# EAGLE board board (EAGLE 6.5.0)
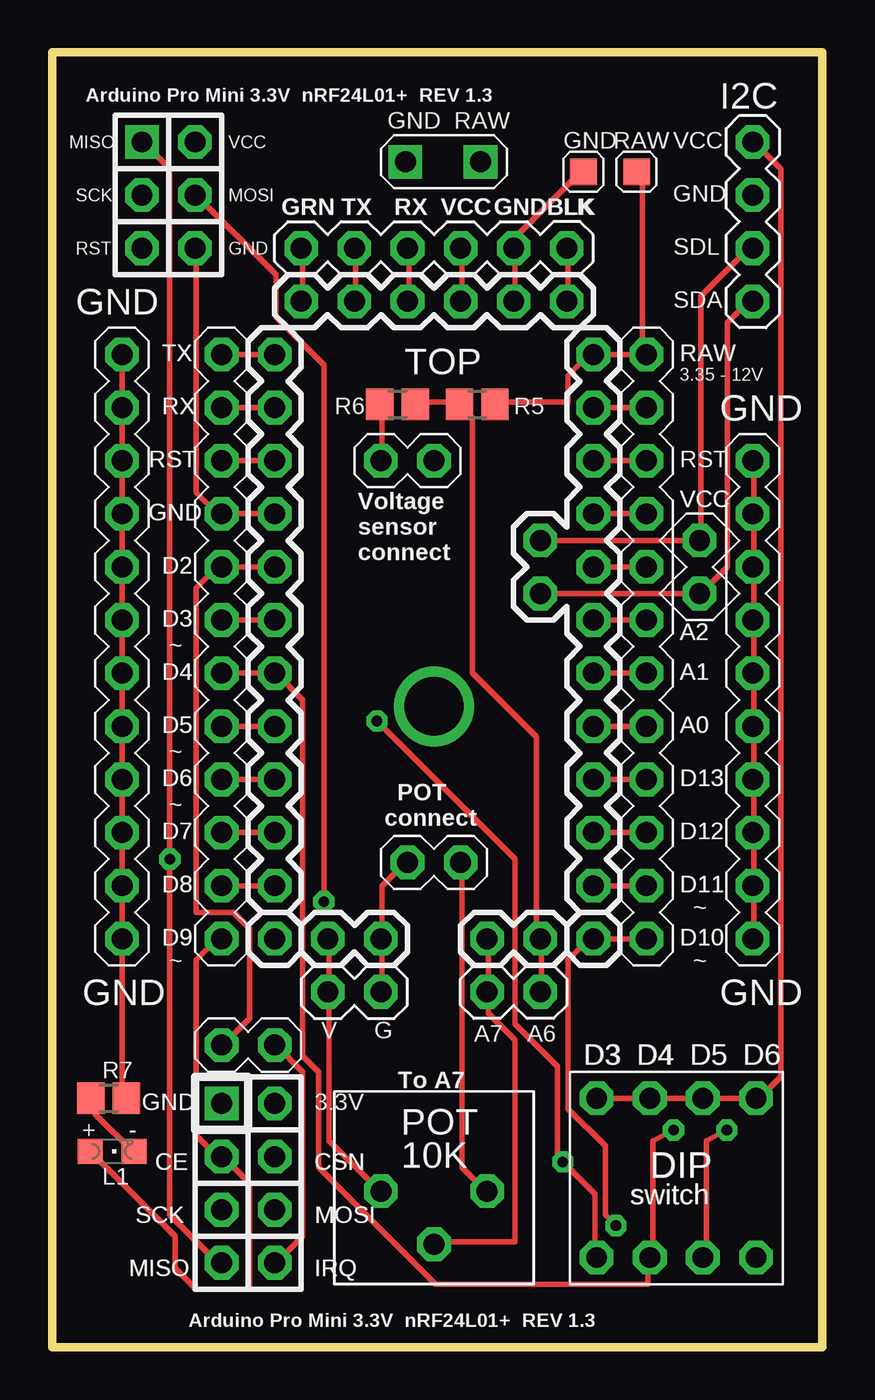
[diagram p0: board, top side]
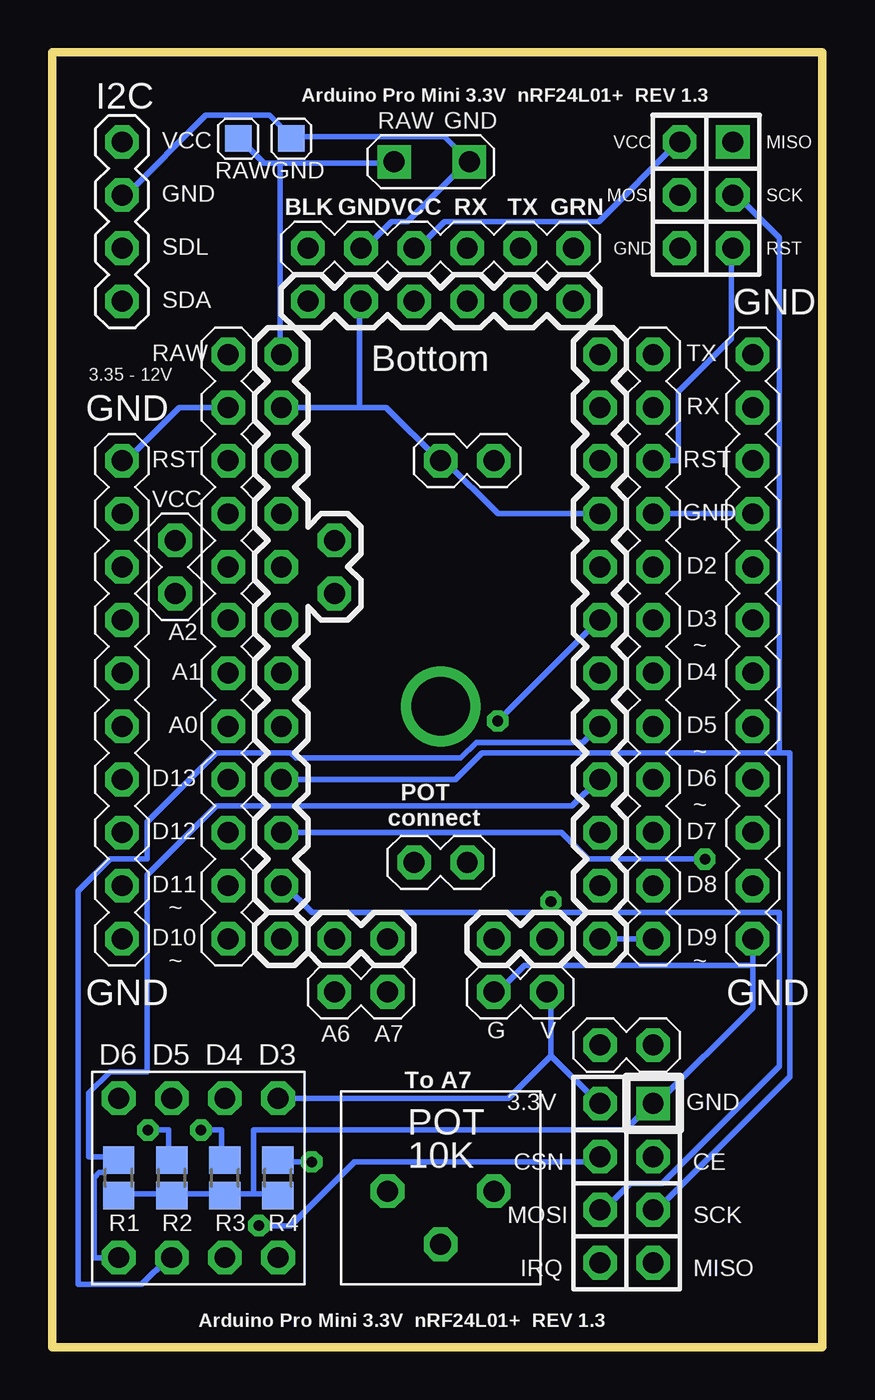
[diagram p1: board, bottom side, seen from below]

Size 36.83 x 61.91 mm. Coordinates in mm from the lower left corner, seen from the top.
Outline: 0,61.91 0,0 36.83,0 36.83,61.91 0,61.91
Copper layers (1*16): Top 0.0356mm / dielectric 1.5011mm / Bottom 0.0356mm
Design rules "SparkFun_oshpark": minimum track width 10mil, minimum drill 20mil, track to track 10mil, track to pad 10mil, pad to pad 10mil, via to via 10mil, smd to smd 10mil, copper to edge 15mil, drill to drill 10mil, minimum pad ring 12mil, minimum via ring 10mil, stop-mask expansion 3mil, vias tented up to drill 0mil, thermal gap 10mil

## Footprints (pad centres in the part's own frame; a part is rotated, then mirrored left to right if it is on the bottom)
ARDUINO_PRO_MINI_3.3V = drill 1 octagon: A0 -4.128,-2.54; A1 -4.128,0; A2 -4.128,2.54; A3 -4.128,5.08; A4 -6.668,3.81; A5 -6.668,6.35; A6 -6.668,-12.7; A7 -9.207,-12.7; BLK -5.397,17.78; D2 -19.367,5.08; D3 -19.367,2.54; D4 -19.367,0; D5 -19.367,-2.54; D6 -19.367,-5.08; D7 -19.367,-7.62; D8 -19.367,-10.16; D9 -19.367,-12.7; D10 -4.128,-12.7; D11 -4.128,-10.16; D12 -4.128,-7.62; D13 -4.128,-5.08; G -14.287,-12.7; GND_0 -4.128,12.7; GND_1 -19.367,7.62; GND_2 -7.938,17.78; GRN -18.098,17.78; RAW -4.128,15.24; RST_0 -4.128,10.16; RST_1 -19.367,10.16; RX -13.018,17.78; RX/D1 -19.367,12.7; TX -15.557,17.78; TX/D0 -19.367,15.24; V -16.828,-12.7; VCC_0 -4.128,7.62; VCC_1 -10.477,17.78
12_PIN_HEADER = drill 1 octagon: 1 0,12.7; 2 0,10.16; 3 0,7.62; 4 0,5.08; 5 0,2.54; 6 0,0; 7 0,-2.54; 8 0,-5.08; 9 0,-7.62; 10 0,-10.16; 11 0,-12.7; 12 0,-15.24
PAD_CONNECT = smd 1.27 x 1.27: GND_1 -1.27,-0.318; RAW_1 1.27,-0.318 | smd 1.27 x 1.27 bottom: GND_2 -1.27,1.27; RAW_2 1.27,1.27
6_PIN_HEADER = drill 1 octagon: 1 -6.032,1.587; 2 -3.493,1.587; 3 -0.953,1.587; 4 1.587,1.587; 5 4.128,1.587; 6 6.668,1.587
2_SPACE_2_HEADER = drill 1 octagon: 1 -3.81,0; 2 -1.27,0; 3 3.81,0; 4 6.35,0
18650_HOLDER_FITTED = drill 2.8: P$1 -5.08,0.635
12_PIN_HEADER' = drill 1 octagon: 1 0,13.97; 2 0,11.43; 3 0,8.89; 4 0,6.35; 5 0,3.81; 6 0,1.27; 7 0,-1.27; 8 0,-3.81; 9 0,-6.35; 10 0,-8.89; 11 0,-11.43; 12 0,-13.97
4-DIP = smd 1.5 x 1.3 bottom: D3 -3.81,0.532; D4 -1.27,0.532; D5 1.27,0.532; D6 3.81,0.532; GND_1 -3.81,-1.167; GND_2 -1.27,-1.167; GND_3 1.27,-1.167; GND_4 3.81,-1.167 | drill 1 octagon: OFF_1 -3.81,-4.128; OFF_2 -1.27,-4.128; OFF_3 1.27,-4.128; OFF_4 3.81,-4.128; VCC_1 -3.81,3.493; VCC_2 -1.27,3.493; VCC_3 1.27,3.493; VCC_4 3.81,3.493
2_PIN_HEADER = drill 1 octagon: 1 0,1.27; 2 0,-1.27
4_PIN_HEADER = drill 1 octagon: 1 -3.81,0; 2 -1.27,0; 3 1.27,0; 4 3.81,0
10_PIN_HEADER = drill 1 octagon: P$1 0,11.43; P$2 0,8.89; P$3 0,6.35; P$4 0,3.81; P$5 0,1.27; P$6 0,-1.27; P$7 0,-3.81; P$8 0,-6.35; P$9 0,-8.89; P$10 0,-11.43
POT_10K = drill 1 octagon: CCW 2.54,-0.318; CW -2.54,-0.318; WIPER 0,-2.857
0805_SMD_RESISTOR = smd 1.3 x 1.5: 1 -0.85,0; 2 0.85,0
0805_SMD_LED = smd 1.2 x 1.2: A 0,-1.05; C 0,1.05
NRFL2401 = drill 1 octagon: 3.3V 1.27,3.81; CE -1.27,1.27; CSN 1.27,1.27; IRQ 1.27,-3.81; MISO -1.27,-3.81; MOSI 1.27,-1.27; SCK -1.27,-1.27 | drill 1 square: GND -1.27,3.81
SCREWTERMINAL = drill 1 square: GND -2.005,0; RAW_3 1.587,0
SPI = drill 1 octagon: GND 1.27,-2.54; MOSI 1.27,0; RESET -1.27,-2.54; SCK -1.27,0; VCC 1.27,2.54 | drill 1 square: MISO -1.27,2.54

## Placement (x,y rotation side)
U$1  ARDUINO_PRO_MINI_3.3V  [ARDUINO_PRO_MINI_3.3V]  30,32.23 0 top
U$2  [12_PIN_HEADER]  8.1,34.77 0 top
U$3  [12_PIN_HEADER]  28.42,34.77 0 top
U$4  PAD_CONNECT  [PAD_CONNECT]  26.67,56.52 0 top
U$5  6_PIN_HEADER  [6_PIN_HEADER]  17.94,50.96 0 top
U$6  2_SPACE_2_HEADER  [2_SPACE_2_HEADER]  16.99,16.99 0 top
U$7  18650_HOLDER_FITTED  [18650_HOLDER_FITTED]  23.34,30 0 top
U$8  12_PIN_HEADER  [12_PIN_HEADER']  3.33,33.5 0 top
U$9  [4-DIP]  29.84,8.41 0 top
U$10  2_PIN_HEADER  [2_PIN_HEADER]  9.37,14.45 270 top
U$11  4_PIN_HEADER  [4_PIN_HEADER]  33.5,53.82 270 top
U$12  10_PIN_HEADER  [10_PIN_HEADER]  33.5,30.96 0 top
U$13  [POT_10K]  18.26,7.78 0 top
U$14  2_PIN_HEADER  [2_PIN_HEADER]  18.26,23.18 270 top
U$15  2_PIN_HEADER  [2_PIN_HEADER]  16.99,42.39 270 top
U$16  1k  [0805_SMD_RESISTOR]  16.51,45.09 0 top
U$17  1k  [0805_SMD_RESISTOR]  20.32,45.09 0 top
U$18  0805_SMD_LED  [0805_SMD_LED]  2.86,9.37 270 top
U$19  ???R  [0805_SMD_RESISTOR]  2.7,11.91 0 top
U$20  2_PIN_HEADER  [2_PIN_HEADER]  30.96,37.31 0 top
U$21  NRF24L01  [NRFL2401]  9.37,7.84 0 top
U$22  SCREWTERMINAL  [SCREWTERMINAL]  18.89,56.67 0 top
U$23  SPI  [SPI]  5.56,55.09 0 top

## Library data of the parts
U$1 = arduino_pro_mini_3.3v
U$2 U$3 = 12_pin_header
U$4 U$22 = 18650_batt_connect
U$5 = 6_pin_header
U$6 = 2_space_2_header
U$7 = 18650_holder_fitted_v2
U$8 U$11 U$12 = Headers
U$9 = DIPS_Arduino
U$10 U$14 U$15 U$20 = 2_PIN_HEADER
U$13 = pot_10k
U$16-U$19 = 0805_SMD
U$21 = nrf24l01_connection
U$23 = SPI

## Nets
BLK: U$1.BLK U$5.6
GND: U$1.G U$1.GND_0 U$1.GND_1 U$1.GND_2 U$2.4 U$3.2 U$4.GND_1 U$4.GND_2 U$5.5 U$6.2 U$8.1 U$8.2 U$8.3 U$8.4 U$8.5 U$8.6 U$8.7 U$8.8 U$8.9 U$8.10 U$8.11 U$8.12 U$9.GND_1 U$9.GND_2 U$9.GND_3 U$9.GND_4 U$11.2 U$12.P$1 U$12.P$2 U$12.P$3 U$12.P$4 U$12.P$5 U$12.P$6 U$12.P$7 U$12.P$8 U$12.P$9 U$12.P$10 U$14.2 U$15.1 U$19.2 U$21.GND U$22.GND U$23.GND
GRN: U$1.GRN U$5.1
N$1: U$1.TX/D0 U$2.1
N$2: U$1.RX/D1 U$2.2
N$3: U$1.RST_1 U$2.3 U$23.RESET
N$4: U$1.RX U$5.3
N$5: U$10.1 U$21.IRQ
N$6: U$1.VCC_0 U$3.4
N$7: U$1.A5 U$11.3 U$20.1
N$8: U$1.VCC_1 U$5.4 U$23.VCC
N$9: U$15.2 U$16.1
N$10: U$13.CCW U$14.1
N$11: U$18.C U$19.1
N$13: U$1.D10 U$3.12 U$21.CSN
N$14: U$1.D11 U$3.11 U$21.MOSI U$23.MOSI
N$15: U$1.D3 U$2.6 U$9.D3 U$9.OFF_1
N$16: U$1.RST_0 U$3.3
N$17: U$1.A3 U$3.5
N$18: U$1.A2 U$3.6
N$19: U$1.A1 U$3.7
N$20: U$1.A0 U$3.8
N$21: U$1.A4 U$11.4 U$20.2
N$23: U$1.A6 U$6.4 U$16.2 U$17.1
N$24: U$1.D9 U$2.12 U$18.A U$21.CE
N$25: U$1.D2 U$2.5 U$10.2
N$26: U$1.A7 U$6.3 U$13.WIPER
N$27: U$1.RAW U$3.1 U$4.RAW_1 U$4.RAW_2 U$17.2 U$22.RAW_3
N$28: U$1.D12 U$3.10 U$21.MISO U$23.MISO
N$29: U$1.D5 U$2.8 U$9.D5 U$9.OFF_3
N$30: U$1.D4 U$2.7 U$9.D4 U$9.OFF_2
N$31: U$1.D7 U$2.10
N$32: U$1.D8 U$2.11
N$35: U$1.D6 U$2.9 U$9.D6 U$9.OFF_4
N$37: U$1.D13 U$3.9 U$21.SCK U$23.SCK
TX: U$1.TX U$5.2
VCC: U$1.V U$6.1 U$9.VCC_1 U$9.VCC_2 U$9.VCC_3 U$9.VCC_4 U$11.1 U$13.CW U$21.3.3V

## Tracks (layer width: path | path; a pad name or v marks a point on that pad's centre or on a via)
BLK
  Top 0.254: U$1.BLK 24.67,50.01 24.67,52.55 U$5.6
GND
  Top 0.254: 33.56,39.85 33.56,42.39 U$12.P$1 | 33.56,37.31 33.56,34.77 | 33.56,32.23 33.56,29.69 | 33.56,22.07 33.56,19.53 U$12.P$10 | 33.56,27.15 33.56,24.61 | 33.56,24.61 33.56,22.07 | 33.56,22.07 U$12.P$9 | 33.56,24.61 U$12.P$8 | 33.56,27.15 33.56,29.69 | 33.56,29.69 U$12.P$6 | 33.56,27.15 U$12.P$7 | 33.56,32.23 33.56,34.77 | 33.56,34.77 U$12.P$4 | 33.56,32.23 U$12.P$5 | 33.56,37.31 33.56,39.85 | 33.56,39.85 U$12.P$2 | 33.56,37.31 U$12.P$3 | 22.13,52.55 22.13,53.05 25.18,56.1 U$4.GND_1 | 22.13,52.55 22.13,50.01 U$1.GND_2 | 22.13,52.55 U$5.5 | U$1.GND_0 U$3.2 | U$1.GND_1 U$2.4 7.91,39.85 6.89,40.86 6.89,52.55 U$23.GND | 15.78,19.53 15.78,16.99 U$6.2 | 15.78,19.53 15.78,22.07 16.8,23.08 U$14.2 | 15.78,19.53 U$1.G | U$8.1 U$8.2 U$8.3 U$8.4 U$8.5 U$8.6 U$8.7 U$8.8 U$8.9 U$8.10 U$8.11 U$8.12 3.33,11.91 U$19.2
  Bottom 0.254: U$11.2 33.31,55.09 29.5,58.9 26.45,58.9 25.43,57.88 U$4.GND_2 25.18,57.88 18.07,57.88 17.05,56.86 U$22.GND 17.05,56.61 19.84,53.82 20.61,53.82 21.88,52.55 U$5.5 | U$1.GND_0 22.13,44.93 | 22.13,44.93 20.86,44.93 18.32,42.39 U$15.1 18.07,42.39 15.53,39.85 U$1.GND_1 | 22.13,44.93 22.13,50.01 U$1.GND_2 | U$3.2 30.77,44.93 33.31,42.39 U$12.P$1 | 27.21,7.33 28.48,7.33 U$9.GND_2 28.73,7.33 31.02,7.33 U$9.GND_3 31.27,7.33 33.56,7.33 U$9.GND_4 | 27.21,7.33 26.19,7.33 U$9.GND_1 | U$8.12 3.33,18.26 | 3.33,18.26 3.33,16.22 7.91,11.65 U$21.GND 8.16,11.65 9.43,10.38 27.21,10.38 27.21,7.33 | 3.33,18.26 14.26,18.26 15.53,16.99 U$6.2 | U$8.4 U$2.4
GRN
  Top 0.254: U$1.GRN 11.97,50.01 11.97,52.55 U$5.1
N$1
  Top 0.254: U$1.TX/D0 U$2.1
N$2
  Top 0.254: U$1.RX/D1 U$2.2
N$3
  Top 0.254: U$1.RST_1 U$2.3
  Bottom 0.254: U$2.3 6.89,42.39 6.89,45.69 4.35,48.23 4.35,52.55 U$23.RESET
N$4
  Top 0.254: U$1.RX 17.05,50.01 17.05,52.55 U$5.3
N$5
  Top 0.254: U$21.IRQ 10.7,4.03 11.97,5.3 11.97,13.18 10.7,14.45 U$10.1
N$6
  Top 0.254: U$3.4 U$1.VCC_0
N$7
  Top 0.254: U$1.A5 U$20.1 31.02,38.58 31.02,50.26 33.31,52.55 U$11.3
N$8
  Top 0.254: U$1.VCC_1 19.59,50.01 19.59,52.55 U$5.4
  Bottom 0.254: U$23.VCC 6.89,57.63 10.7,53.82 18.07,53.82 19.34,52.55 U$5.4
N$9
  Top 0.254: U$16.1 15.78,44.93 15.78,42.39 U$15.2
N$10
  Top 0.254: U$13.CCW 20.61,7.59 19.59,8.6 19.59,23.08 U$14.1
N$11
  Top 0.254: U$18.C 3.84,9.37 2.06,11.14 2.06,11.91 U$19.1
N$13  (via drill 0.51)
  Top 0.254: v26.96,5.81 26.45,6.32 26.45,9.62 24.67,11.4 24.67,18.51 25.69,19.53 U$1.D10 U$3.12
  Bottom 0.254: v26.96,5.81 25.43,5.81 22.38,8.86 10.95,8.86 10.7,9.11 U$21.CSN
N$14  (via drill 0.51)
  Top 0.254: U$1.D11 U$3.11 | v12.99,21.3 12.99,46.96 10.7,49.24 10.7,51.28 6.89,55.09 U$23.MOSI
  Bottom 0.254: 12.99,20.8 24.42,20.8 25.69,22.07 U$1.D11 | 12.99,20.8 2.06,20.8 2.06,13.43 7.65,7.84 9.18,7.84 10.45,6.57 U$21.MOSI | 12.99,20.8 v12.99,21.3
N$15  (via drill 0.51)
  Top 0.254: U$1.D3 U$2.6 | U$9.OFF_1 25.94,4.29 25.94,7.33 v24.42,8.86 24.16,9.11 24.16,13.43 22.13,15.46 22.13,23.34 v15.53,29.94
  Bottom 0.254: v24.42,8.86 25.94,8.86 U$9.D3 | v15.53,29.94 10.7,34.77 U$1.D3
N$16
  Top 0.254: U$3.3 U$1.RST_0
N$17
  Top 0.254: U$3.5 U$1.A3
N$18
  Top 0.254: U$3.6 U$1.A2
N$19
  Top 0.254: U$3.7 U$1.A1
N$20
  Top 0.254: U$3.8 U$1.A0
N$21
  Top 0.254: U$1.A4 U$20.2 31.02,36.04 32.29,37.31 32.29,48.99 33.31,50.01 U$11.4
N$23
  Top 0.254: U$16.2 17.56,45.18 19.34,45.18 U$17.1 19.59,44.93 20.1,44.42 20.1,32.23 23.15,29.18 23.15,19.53 U$1.A6 23.4,19.53 23.4,16.99 U$6.4
N$24
  Top 0.254: U$18.A 5.87,5.3 5.87,3.78 6.89,2.76 9.43,2.76 9.43,7.84 8.16,9.11 U$21.CE 7.91,9.11 6.89,10.13 6.89,18.51 7.91,19.53 U$2.12
  Bottom 0.254: U$1.D9 U$2.12
N$25
  Top 0.254: U$10.2 8.16,14.45 9.43,15.72 9.43,20.03 8.67,20.8 6.89,20.8 6.89,36.29 7.91,37.31 U$2.5 U$1.D2
N$26
  Top 0.254: 20.86,16.99 20.86,15.97 22.13,14.7 22.13,5.05 18.32,5.05 U$13.WIPER | 20.86,16.99 20.86,19.53 U$1.A7 | 20.86,16.99 U$6.3
N$27
  Top 0.254: U$17.2 21.37,45.18 24.67,45.18 24.67,46.45 25.69,47.47 U$1.RAW 28.23,47.47 | 28.23,47.47 28.23,55.85 27.97,56.1 U$4.RAW_1 | 28.23,47.47 U$3.1
  Bottom 0.254: 25.94,56.61 20.61,56.61 U$22.RAW_3 | 25.94,56.61 26.7,56.61 27.72,57.63 U$4.RAW_2 | 25.94,56.61 25.94,47.47 U$1.RAW
N$28  (via drill 0.51)
  Top 0.254: U$3.10 U$1.D12 | U$21.MISO 7.91,4.03 5.62,6.32 v5.62,23.34 5.62,56.36 4.35,57.63 U$23.MISO
  Bottom 0.254: U$1.D12 12.48,24.61 11.21,23.34 v5.62,23.34
N$29  (via drill 0.51)
  Top 0.254: U$1.D5 U$2.8 | v32.26,10.38 31.27,9.87 31.27,4.29 U$9.OFF_3
  Bottom 0.254: v32.26,10.38 31.27,10.38 31.27,9.11 U$9.D5 | U$1.D5 10.7,29.69 11.46,28.92 16.54,28.92 17.3,28.16 25.18,28.16 25.43,28.42 28.99,28.42 32.29,25.11 32.29,23.34 34.07,23.34 35.59,21.81 35.59,3.02 32.54,3.02 31.27,4.29 U$9.OFF_3
N$30  (via drill 0.51)
  Top 0.254: U$2.7 U$1.D4 10.7,32.23 11.97,30.96 11.97,13.94 12.73,13.18 12.73,8.6 18.32,3.02 28.48,3.02 28.48,4.29 U$9.OFF_2 28.73,4.29 28.73,9.87 v29.72,10.38
  Bottom 0.254: v29.72,10.38 28.73,10.38 28.73,9.11 U$9.D4
N$31
  Top 0.254: U$1.D7 U$2.10
N$32
  Top 0.254: U$1.D8 U$2.11
N$35
  Top 0.254: U$1.D6 U$2.9
  Bottom 0.254: U$9.OFF_4 34.83,4.29 34.83,8.1 34.58,8.35 34.32,8.35 33.81,8.86 U$9.D6 33.81,9.11 35.08,9.11 35.08,12.16 34.07,13.18 32.29,13.18 32.29,22.57 28.99,25.88 11.97,25.88 10.7,27.15 U$1.D6
N$37
  Top 0.254: U$1.D13 U$3.9
  Bottom 0.254: 2.06,28.42 16.29,28.42 17.56,27.15 U$1.D13 | 2.06,28.42 1.56,28.42 1.56,12.92 7.91,6.57 U$21.SCK | 2.06,28.42 2.06,53.05 4.1,55.09 U$23.SCK
TX
  Top 0.254: U$1.TX 14.51,50.01 14.51,52.55 U$5.2
VCC
  Top 0.254: 13.24,16.99 13.24,9.87 15.53,7.59 U$13.CW | 13.24,16.99 13.24,19.53 U$1.V | 13.24,16.99 U$6.1 | U$9.VCC_1 U$9.VCC_2 U$9.VCC_3 U$9.VCC_4 33.81,11.91 34.83,12.92 34.83,56.36 33.56,57.63 U$11.1
  Bottom 0.254: 12.99,13.94 10.7,11.65 U$21.3.3V | 12.99,13.94 12.99,16.99 U$6.1 | 12.99,13.94 15.02,11.91 U$9.VCC_1

## Text on the board
tPlace: Arduino Pro Mini 3.3V nRF24L01+ REV 1.3 | I2C | GND | RAW | VCC | GRN | GRN | TX | TX | RX | RX | VCC | VCC | GND | GND | BLK | BLK | GND | SDL | GND | SDA | TX | TX | RAW | RAW | TOP | 3.35 - 12V | RX | RX | R6 | R5 | GND | RST | RST | RST | VCC | VCC | GND | GND | D2 | D2 | Voltage / sensor / connect | D3 | D3 | ~ | A2 | A2 | D4 | D4 | A1 | A1 | D5 | D5 | A0 | A0 | ~ | D6 | D6 | D13 | D13 | ~ | POT / connect | D7 | D7 | D12 | D12 | D8 | D8 | D11 | D11 | ~ | D9 | D9 | D10 | D10 | ~ | ~ | GND | GND | V | G | A7 | A6 | R7 | To A7 | + | - | L1 | Arduino Pro Mini 3.3V nRF24L01+ REV 1.3
bPlace: Arduino Pro Mini 3.3V nRF24L01+ REV 1.3 | I2C | GND | RAW | VCC | GRN | TX | RX | VCC | GND | BLK | GND | SDL | GND | SDA | TX | RAW | Bottom | 3.35 - 12V | RX | GND | RST | RST | VCC | GND | D2 | D3 | ~ | A2 | D4 | A1 | D5 | A0 | ~ | D6 | D13 | ~ | POT / connect | D7 | D12 | D8 | D11 | ~ | D9 | D10 | ~ | ~ | GND | GND | V | G | A7 | A6 | To A7 | R4 | R3 | R2 | R1 | Arduino Pro Mini 3.3V nRF24L01+ REV 1.3